# Altium PCB HP-server-silencer-PCB.pcbdoc
Units mm, origin at the board's own origin, x right, y up, seen from the top; angles counter-clockwise.
Board outline 83.4 x 60.4 mm, 2 copper layers (Top Layer, Bottom Layer); 26 components, 20 nets, 115 pads, 43 vias.
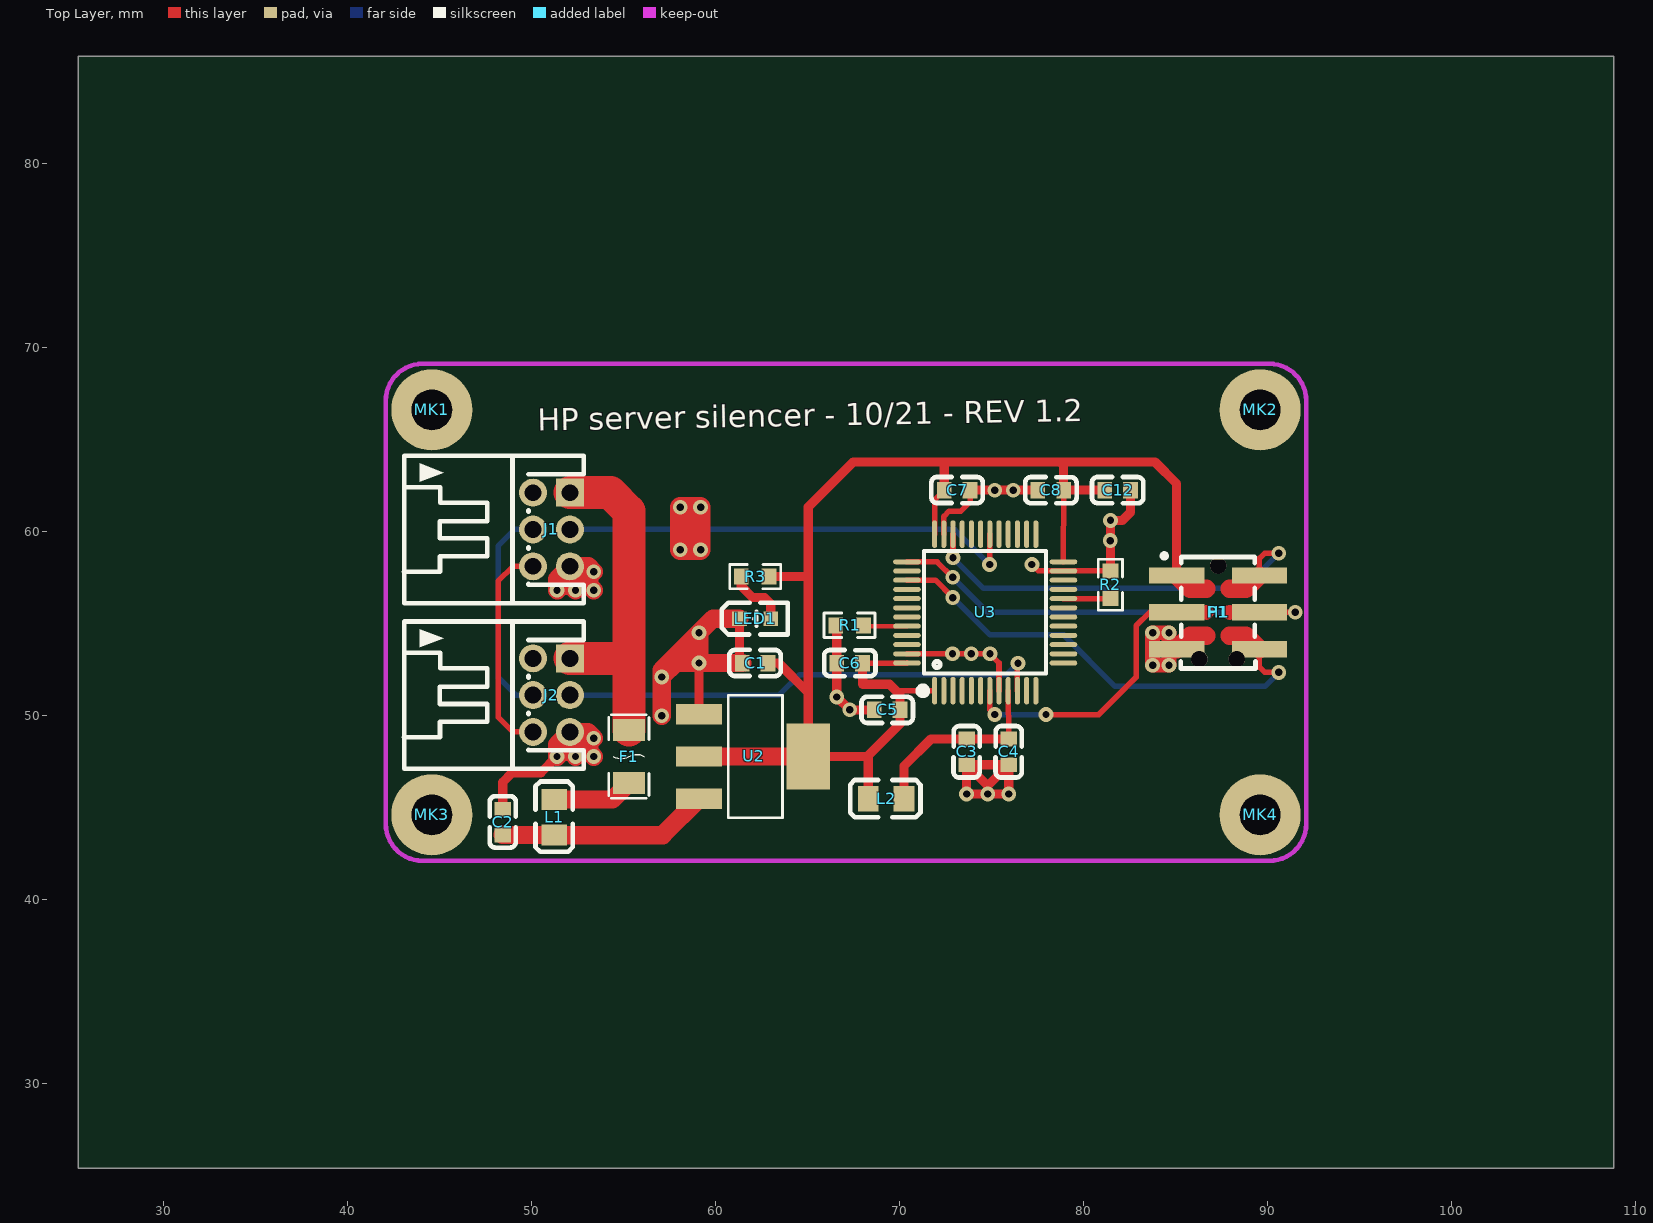
[diagram p0: Top Layer view]
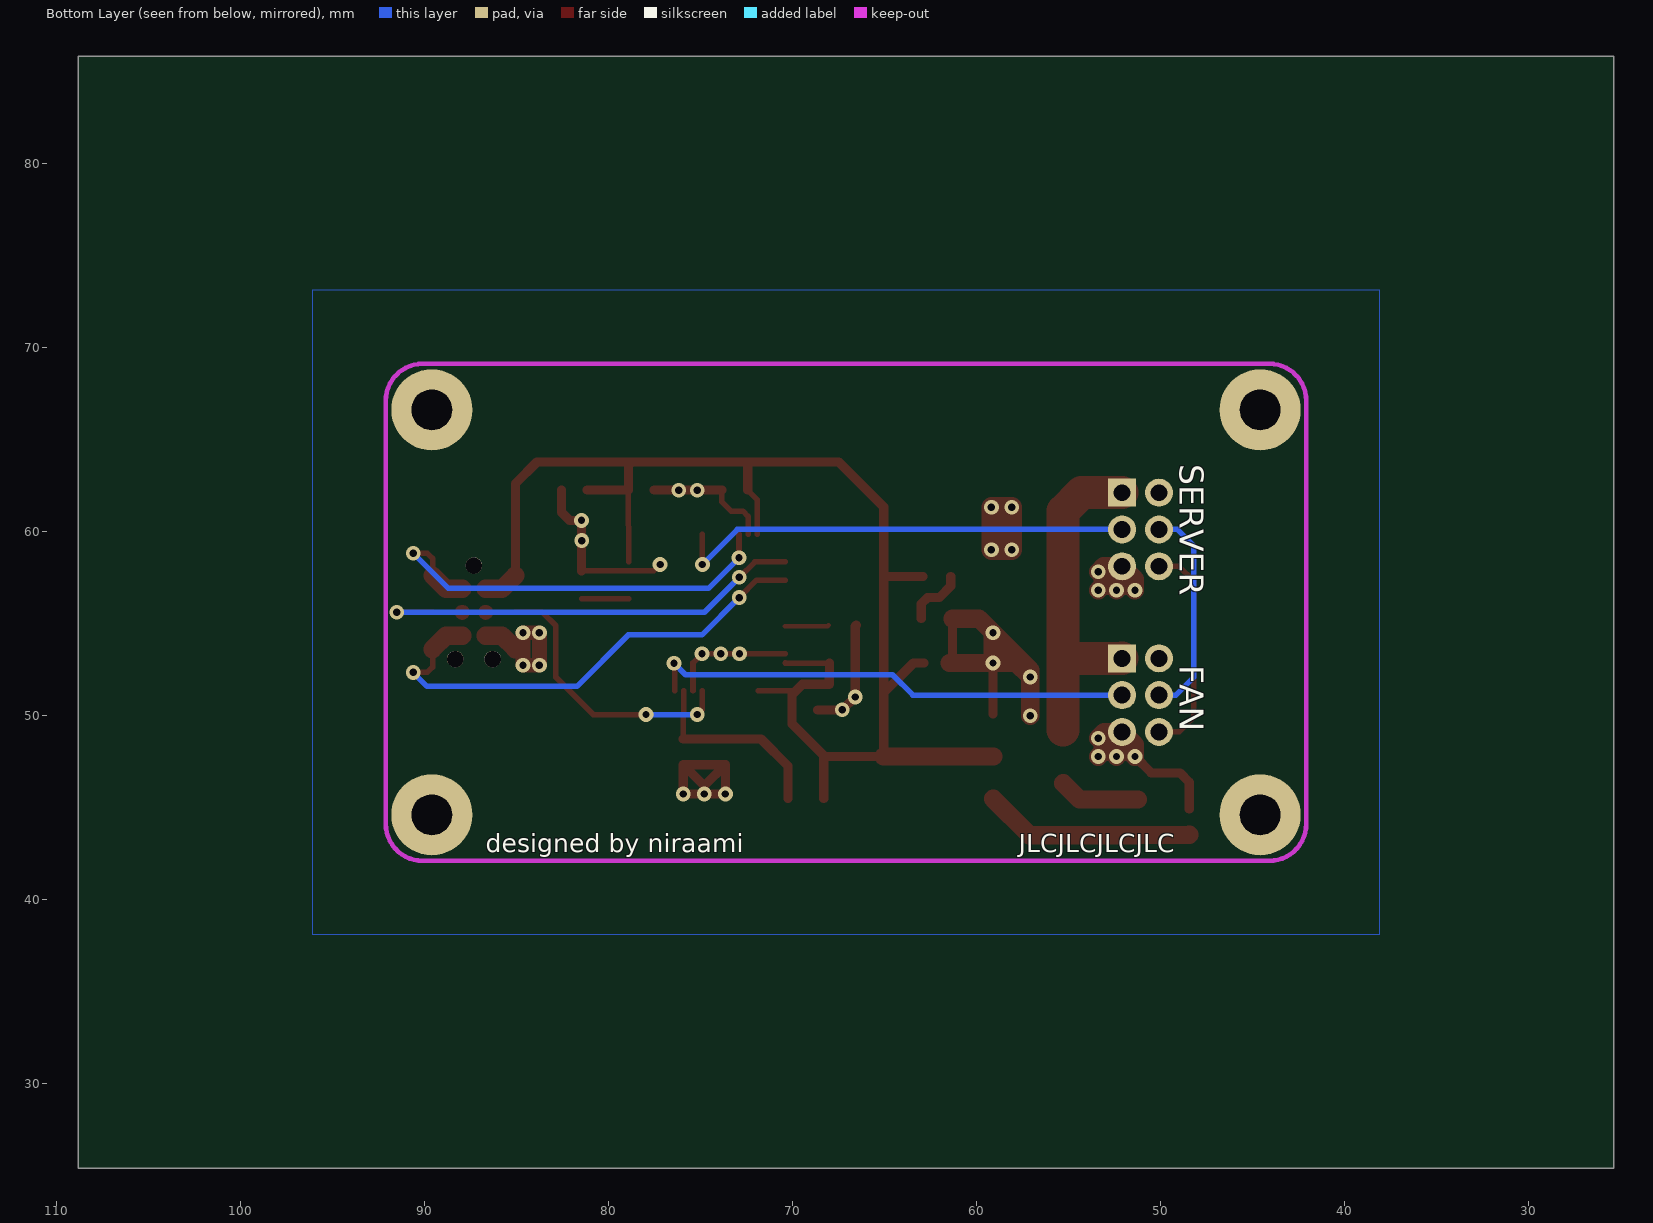
[diagram p1: Bottom Layer view, seen from below]

## Layer stack, top to bottom
Top Layer: signal copper (thickness not stored)
Dielectric: dielectric 0.32, FR-4, Dk 4.8
Bottom Layer: signal copper (thickness not stored)

## Board outline
108.8,25.4 25.4,25.4 25.4,85.8 108.8,85.8

## Components (designator, comment, footprint, x,y, rotation, side; value= is the part's Value field where it differs from the comment)
C1 "10uF" C0603 62.166,52.844 r0 top
C2 "10uF" C0603 48.45,44.208 r270 top
C3 "100nF" C0603 73.65,48.014 r270 top
C4 "10nF" C0603 75.936,48.014 r270 top
C5 "100nF" C0603 69.332,50.3 r180 top
C6 "100nF" C0603 67.3,52.84 r180 top
C7 "100nF" C0603 73.142,62.238 r0 top
C8 "100nF" C0603 78.222,62.238 r180 top
C12 "10uF" C0603 81.851,62.242 r180 top
F1 "350mA" F1206 55.308,47.764 r270 top
H1 "SMD header" HDR-SMD_6P-P2.00-V-M-R2-C3-S2.0 87.312,55.6 r270 top
J1 "PHD-2*3AW" CONN-TH_A2004WR-2X03P 51.099,60.099 r270 top
J2 "PHD-2*3AW" CONN-TH_A2004WR-2X03P 51.099,51.1 r270 top
L1 "100 @ 100MHz" L0805 51.244,44.462 r270 top
L2 "100 @ 100MHz" L0805 69.278,45.478 r0 top
LED1 "Green" LED0603-R-RD 62.166,55.257 r0 top
MK1 "Mounting_Hole_PAD" MOUNTINGHOLE_2.2MM_M2_PAD 44.6,66.6 r0 top
MK2 "Mounting_Hole_PAD" MOUNTINGHOLE_2.2MM_M2_PAD 89.6,66.6 r0 top
MK3 "Mounting_Hole_PAD" MOUNTINGHOLE_2.2MM_M2_PAD 44.6,44.6 r0 top
MK4 "Mounting_Hole_PAD" MOUNTINGHOLE_2.2MM_M2_PAD 89.6,44.6 r0 top
P1 "TC2030-NL" TC2030-MCP-NL-JKA 87.312,58.14 r270 top
R1 "10K" R0603 67.298,54.894 r0 top
R2 "10K" R0603 81.462,57.096 r270 top
R3 "180" R0603 62.166,57.543 r0 top
U2 "AMS1117-3.3" SOT-223-3_L6.5-W3.4-P2.30-LS7.0-BR 62.078,47.768 r180 top
U3 "STM32F103C8" LQFP-48_L7.0-W7.0-P0.50-LS9.0-BL 74.663,55.595 r0 top

## Footprints (in the part's own frame and the unit in brackets; to place one, negate y for a bottom-side part, rotate by r counter-clockwise, add the part's x,y. Pads: shape width x height; smd on the part's side, far side on the other; paste and mask are expansions set on the pad)
C0603 [mm]
  rect 0.8x0.9 smd: 1(-0.7,0) 2(0.7,0)
  silkscreen extent -1.41,-0.71 1.39,0.72
CONN-TH_A2004WR-2X03P [mil]
  rect 60x60 hole 36: 1(-78.74,39.37)
  round 60 hole 36: 2(-78.74,-39.37) 3(0,39.37) 4(0,-39.37) 5(78.74,39.37) 6(78.74,-39.37)
  silkscreen extent -157,-315 157,69
F1206 [mm]
  rect 1.19x1.728 smd: 1(-1.445,0) 2(1.445,0)
  silkscreen extent -2.27,-1.09 2.27,1.09
HDR-SMD_6P-P2.00-V-M-R2-C3-S2.0 [mm]
  rect 0.89x3 smd: 1(-2,-2.25) 2(-2,2.25) 3(0,-2.25) 4(0,2.25) 5(2,-2.25) 6(2,2.25)
  silkscreen extent -3.19,-3.05 3.05,2.03
L0805 [mm]
  rect 1.133x1.377 smd: 1(-0.966,0) 2(0.966,0)
  silkscreen extent -1.95,-1.02 1.86,1.02
LED0603-R-RD [mm]
  rect 0.8x0.8 smd: 1(0.851,0) 2(-0.851,0)
  silkscreen extent -1.82,-0.86 1.77,0.86
LQFP-48_L7.0-W7.0-P0.50-LS9.0-BL [mm]
  oval 0.27x1.5 smd: 1(-2.75,-4.25) 2(-2.25,-4.25) 3(-1.75,-4.25) 4(-1.25,-4.25) 5(-0.75,-4.25) 6(-0.25,-4.25) 7(0.25,-4.25) 8(0.75,-4.25) 9(1.25,-4.25) 10(1.75,-4.25) 11(2.25,-4.25) 12(2.75,-4.25) 25(2.75,4.25) 26(2.25,4.25) 27(1.75,4.25) 28(1.25,4.25) 29(0.75,4.25) 30(0.25,4.25) 31(-0.25,4.25) 32(-0.75,4.25) 33(-1.25,4.25) 34(-1.75,4.25) 35(-2.25,4.25) 36(-2.75,4.25)
  oval 1.5x0.27 smd: 13(4.25,-2.75) 14(4.25,-2.25) 15(4.25,-1.75) 16(4.25,-1.25) 17(4.25,-0.75) 18(4.25,-0.25) 19(4.25,0.25) 20(4.25,0.75) 21(4.25,1.25) 22(4.25,1.75) 23(4.25,2.25) 24(4.25,2.75) 37(-4.25,2.75) 38(-4.25,2.25) 39(-4.25,1.75) 40(-4.25,1.25) 41(-4.25,0.75) 42(-4.25,0.25) 43(-4.25,-0.25) 44(-4.25,-0.75) 45(-4.25,-1.25) 46(-4.25,-1.75) 47(-4.25,-2.25) 48(-4.25,-2.75)
  silkscreen extent -3.59,-4.46 3.3,3.34
MOUNTINGHOLE_2.2MM_M2_PAD [mm]
  round 4.4 hole 2.2 slot 2.205 at 0 deg: 1(0,0)
R0603 [mm]
  rect 0.806x0.864 smd: 1(-0.753,0) 2(0.753,0)
  silkscreen extent -1.39,-0.66 1.39,0.66
SOT-223-3_L6.5-W3.4-P2.30-LS7.0-BR [mm]
  rect 2.5x1.1 smd: 1(2.97,-2.3) 2(2.97,0) 3(2.97,2.3)
  rect 2.34x3.6 smd: 4(-2.97,0)
  silkscreen extent -1.57,-3.33 1.37,3.33
TC2030-MCP-NL-JKA [mil]
  round 0 smd: 1(50,-25) 2(50,25) 3(100,-25) 4(100,25) 5(150,-25) 6(150,25)
  round 35.44 hole 35.44 unplated: ""(0,0) ""(200,-40) ""(200,40)
  Top Layer region: 34.5,25 34.61,26.87 34.95,28.71 35.51,30.5 36.28,32.2 37.24,33.8 38.4,35.28 39.72,36.6 41.19,37.76 42.8,38.72 44.5,39.49 46.29,40.05 48.13,40.39 50,40.5 50,40.5 51.87,40.39 53.71,40.05 55.5,39.49 57.2,38.72 58.8,37.76 60.28,36.6 61.6,35.28 62.76,33.8 63.72,32.2 64.49,30.5 65.05,28.71 65.39,26.87 65.5,25 65.5,25 65.39,23.13 65.05,21.29 64.49,19.5 63.72,17.8 62.76,16.19 61.6,14.72 60.28,13.4 58.8,12.24 57.2,11.28 55.5,10.51 53.71,9.95 51.87,9.61 50,9.5 50,9.5 48.13,9.61 46.29,9.95 44.5,10.51 42.8,11.28 41.19,12.24 39.72,13.4 38.4,14.72 37.24,16.19 36.28,17.8 35.51,19.5 34.95,21.29 34.61,23.13
  Top Layer region: 84.5,25 84.61,26.87 84.95,28.71 85.51,30.5 86.28,32.2 87.24,33.8 88.4,35.28 89.72,36.6 91.19,37.76 92.8,38.72 94.5,39.49 96.29,40.05 98.13,40.39 100,40.5 100,40.5 101.87,40.39 103.71,40.05 105.5,39.49 107.2,38.72 108.8,37.76 110.28,36.6 111.6,35.28 112.76,33.8 113.72,32.2 114.49,30.5 115.05,28.71 115.39,26.87 115.5,25 115.5,25 115.39,23.13 115.05,21.29 114.49,19.5 113.72,17.8 112.76,16.19 111.6,14.72 110.28,13.4 108.8,12.24 107.2,11.28 105.5,10.51 103.71,9.95 101.87,9.61 100,9.5 100,9.5 98.13,9.61 96.29,9.95 94.5,10.51 92.8,11.28 91.19,12.24 89.72,13.4 88.4,14.72 87.24,16.19 86.28,17.8 85.51,19.5 84.95,21.29 84.61,23.13
  Top Layer region: 134.5,25 134.61,26.87 134.95,28.71 135.51,30.5 136.28,32.2 137.24,33.8 138.4,35.28 139.72,36.6 141.19,37.76 142.8,38.72 144.5,39.49 146.29,40.05 148.13,40.39 150,40.5 150,40.5 151.87,40.39 153.71,40.05 155.5,39.49 157.2,38.72 158.8,37.76 160.28,36.6 161.6,35.28 162.76,33.8 163.72,32.2 164.49,30.5 165.05,28.71 165.39,26.87 165.5,25 165.5,25 165.39,23.13 165.05,21.29 164.49,19.5 163.72,17.8 162.76,16.19 161.6,14.72 160.28,13.4 158.8,12.24 157.2,11.28 155.5,10.51 153.71,9.95 151.87,9.61 150,9.5 150,9.5 148.13,9.61 146.29,9.95 144.5,10.51 142.8,11.28 141.19,12.24 139.72,13.4 138.4,14.72 137.24,16.19 136.28,17.8 135.51,19.5 134.95,21.29 134.61,23.13
  Top Layer region: 134.5,-25 134.61,-23.13 134.95,-21.29 135.51,-19.5 136.28,-17.8 137.24,-16.19 138.4,-14.72 139.72,-13.4 141.19,-12.24 142.8,-11.28 144.5,-10.51 146.29,-9.95 148.13,-9.61 150,-9.5 150,-9.5 151.87,-9.61 153.71,-9.95 155.5,-10.51 157.2,-11.28 158.8,-12.24 160.28,-13.4 161.6,-14.72 162.76,-16.19 163.72,-17.8 164.49,-19.5 165.05,-21.29 165.39,-23.13 165.5,-25 165.5,-25 165.39,-26.87 165.05,-28.71 164.49,-30.5 163.72,-32.2 162.76,-33.8 161.6,-35.28 160.28,-36.6 158.8,-37.76 157.2,-38.72 155.5,-39.49 153.71,-40.05 151.87,-40.39 150,-40.5 150,-40.5 148.13,-40.39 146.29,-40.05 144.5,-39.49 142.8,-38.72 141.19,-37.76 139.72,-36.6 138.4,-35.28 137.24,-33.8 136.28,-32.2 135.51,-30.5 134.95,-28.71 134.61,-26.87
  Top Layer region: 84.5,-25 84.61,-23.13 84.95,-21.29 85.51,-19.5 86.28,-17.8 87.24,-16.19 88.4,-14.72 89.72,-13.4 91.19,-12.24 92.8,-11.28 94.5,-10.51 96.29,-9.95 98.13,-9.61 100,-9.5 100,-9.5 101.87,-9.61 103.71,-9.95 105.5,-10.51 107.2,-11.28 108.8,-12.24 110.28,-13.4 111.6,-14.72 112.76,-16.19 113.72,-17.8 114.49,-19.5 115.05,-21.29 115.39,-23.13 115.5,-25 115.5,-25 115.39,-26.87 115.05,-28.71 114.49,-30.5 113.72,-32.2 112.76,-33.8 111.6,-35.28 110.28,-36.6 108.8,-37.76 107.2,-38.72 105.5,-39.49 103.71,-40.05 101.87,-40.39 100,-40.5 100,-40.5 98.13,-40.39 96.29,-40.05 94.5,-39.49 92.8,-38.72 91.19,-37.76 89.72,-36.6 88.4,-35.28 87.24,-33.8 86.28,-32.2 85.51,-30.5 84.95,-28.71 84.61,-26.87
  Top Layer region: 34.5,-25 34.61,-23.13 34.95,-21.29 35.51,-19.5 36.28,-17.8 37.24,-16.19 38.4,-14.72 39.72,-13.4 41.19,-12.24 42.8,-11.28 44.5,-10.51 46.29,-9.95 48.13,-9.61 50,-9.5 50,-9.5 51.87,-9.61 53.71,-9.95 55.5,-10.51 57.2,-11.28 58.8,-12.24 60.28,-13.4 61.6,-14.72 62.76,-16.19 63.72,-17.8 64.49,-19.5 65.05,-21.29 65.39,-23.13 65.5,-25 65.5,-25 65.39,-26.87 65.05,-28.71 64.49,-30.5 63.72,-32.2 62.76,-33.8 61.6,-35.28 60.28,-36.6 58.8,-37.76 57.2,-38.72 55.5,-39.49 53.71,-40.05 51.87,-40.39 50,-40.5 50,-40.5 48.13,-40.39 46.29,-40.05 44.5,-39.49 42.8,-38.72 41.19,-37.76 39.72,-36.6 38.4,-35.28 37.24,-33.8 36.28,-32.2 35.51,-30.5 34.95,-28.71 34.61,-26.87

## Via types
v1: diameter 0.8, hole 0.4, Top Layer to Bottom Layer, 43 vias

## Nets (pads, with @x,y where several pads share a name; then routed paths per layer and width w, separated by ;. In a path a pad name is that pad's centre, name@x,y a point inside that pad or via, vN(x,y) a via of type N, cw(c..) or ccw(c..) an arc to the next point about the centre after c; other vN are vias at no path point)
+3V3: C1.2 C5.1 C6.1 C7.1 C8.1 C12.2 H1.1 L2.1 P1.1 R3.2 U2.2 U2.4 U3.1 U3.24 U3.36 U3.48 | length 82.2
  Top Layer w0.3: C6.1 U3.48@70.412,52.846 ; 69.812,51.346 U3.1@71.873,51.346 ; U3.36 71.912,61.708 C7.1@72.442,62.238 ; U3.24@78.912,58.346 C8.1
  Top Layer w0.5: C1.2 63.436,52.844 65.048,51.232 ; R3.2 65.048,57.543 ; C6.1 68.006,51.696 ; 68.006,51.697 69.462,51.696 70.032,51.126 C5.1 70.032,49.538 68.262,47.768 ; L2.1 68.312,47.718 68.262,47.768 ; C7.1@72.442,62.238 72.442,63.761 72.443,63.762 ; C8.1 78.922,63.57 78.73,63.762 ; C8.1 78.928,62.242 C12.2 ; H1.1 85.062,62.587 83.887,63.762 78.73,63.762 ; 65.048,51.232 65.048,61.318 67.492,63.762 78.73,63.762 ; 65.048,51.232 U2.4 68.262,47.768
  Top Layer w1: U2.2 U2.4 ; H1.1 85.792,56.87 P1.1
+3V3A: C3.1 C4.1 L2.2 U3.9 | length 10.7
  Top Layer w0.3: U3.9 C4.1
  Top Layer w0.5: L2.2 70.244,47.244 71.714,48.714 C3.1 C4.1
BOOT0: R1.2 U3.44 | length 2.4
  Top Layer w0.254: R1.2 68.099,54.846 U3.44@70.412,54.846
BOOT1: R2.2 U3.20 | length 2.6
  Top Layer w0.3: U3.20 R2.2
F1_2: F1.2 L1.1 | length 4.4
  Top Layer w1: L1.1 54.417,45.428 F1.2
FAN_SENSE: J1.6 J2.6 | length 11.9
  Top Layer w0.3: J2.6 49,49.1 48.196,49.904 48.196,57.289 49.007,58.1 J1.6
GND: C1.1 C2.1 C3.2 C4.2 C5.2 C6.2 C7.2 C8.2 C12.1 H1.5 J1.5 J2.5 LED1.2 MK1.1 MK2.1 MK3.1 MK4.1 P1.5 R1.1 R2.1 U2.1 U3.8 U3.23 U3.35 U3.47 | length 98.7
  Top Layer w0.3: U3.47@70.412,53.346 v1(72.888,53.348) v1(73.904,53.348) v1(74.92,53.348) 75.412,52.856 U3.8 ; U3.35 72.412,60.804 72.707,61.099 73.342,61.099 73.842,61.599 C7.2 ; v1(77.2,58.2) 77.554,57.846 U3.23@78.912,57.846 ; U3.23@78.913,57.846 R2.1
  Top Layer w0.5: C2.1 48.45,46.367 48.958,46.875 50.514,46.875 v1(51.403,47.764) v1(52.403,47.764) v1(53.403,47.764) v1(53.403,48.764) ; v1(51.403,56.797) v1(52.403,56.797) v1(53.403,56.797) v1(53.403,57.797) ; U2.1 v1(59.118,52.844) ; LED1.2 61.315,52.995 C1.1 ; R1.1 66.6,54.839 66.6,52.84 v1(66.6,51) v1(67.3,50.3) C5.2@68.632,50.3 ; C7.2 v1(75.174,62.238) v1(76.19,62.238) C8.2@77.522,62.238 ; R2.1 v1(81.462,59.496) ; v1(81.462,59.496) v1(81.47,60.591) 82.105,60.591 82.551,61.037 C12.1 ; C3.2 v1(73.65,45.728) v1(74.793,45.728) ; C3.2 C4.2 ; C3.2 74.793,46.171 ; v1(74.793,45.728) v1(75.936,45.728) C4.2 ; v1(74.793,45.728) 74.793,46.171 ; v1(74.793,45.728) 74.793,46.171 ; 74.793,46.171 C4.2
  Top Layer w0.8: v1(83.756,52.717) v1(84.645,52.717) v1(84.645,54.495) v1(83.756,54.495) v1(83.756,52.717)
  Top Layer w1: v1(51.403,47.764) 51.403,48.403 J2.5 ; v1(51.403,56.797) 51.403,57.403 J1.5 ; v1(52.403,47.764) 52.1,48.067 J2.5 ; v1(52.403,56.797) 52.1,57.1 J1.5 ; v1(53.403,47.764) 52.1,49.067 J2.5 ; v1(53.403,48.764) 53.067,49.1 J2.5 ; v1(53.403,56.797) J1.5 ; v1(53.403,57.797) 53.1,58.1 J1.5 ; v1(57.086,49.982) v1(57.086,52.082) ; LED1.2 59.88,55.257 v1(59.118,54.495) ; C1.1 v1(59.118,52.844) ; H1.5 85.792,54.33 P1.5 ; v1(57.086,52.082) 57.848,52.844 v1(59.118,52.844) ; v1(57.086,52.082) 57.086,52.463 v1(59.118,54.495) ; v1(59.118,52.844) v1(59.118,54.495)
  Top Layer w1.102: v1(58.1,59) v1(59.2,59) v1(59.2,61.3) v1(58.1,61.3) v1(58.1,59)
GND_LOOP: J1.4 J2.4 | length 11.7
  Bottom Layer w0.3: J2.4@50.101,51.099 49.179,51.099 48.196,52.082 48.196,59.194 49.103,60.101 J1.4@50.101,60.101
LED1_1: LED1.1 R3.1 | length 3.3
  Top Layer w0.5: R3.1 61.412,57.027 62.039,56.4 62.674,56.4 63.017,56.057 LED1.1
NRST: H1.3 P1.3 U3.7 | length 15.2
  Top Layer w0.3: U3.7 74.912,50.308 v1(75.174,50.046) ; v1(77.968,50.046) 80.831,50.046 82.867,52.082 82.867,54.876 83.591,55.6 H1.3
  Bottom Layer w0.3: v1(75.174,50.046) v1(77.968,50.046)
PWM_IN: J1.3 U3.30 | length 25.2
  Top Layer w0.3: v1(74.9,58.2) 74.9,59.834 U3.30
  Bottom Layer w0.3: J1.3 73,60.1 v1(74.9,58.2)
PWM_OUT: J2.3 U3.10 | length 26.6
  Top Layer w0.3: U3.10@76.412,51.346 76.412,52.808 v1(76.444,52.84)
  Bottom Layer w0.3: J2.3 63.469,51.099 64.579,52.209 75.813,52.209 v1(76.444,52.84)
S$1221: 
S$1241: 
S$1243: 
SWCLK: H1.4 P1.4 U3.37 | length 24.2
  Top Layer w0.3: U3.37 72.055,58.345 v1(72.9,57.5) ; H1.4 v1(91.5,55.6)
  Bottom Layer w0.3: v1(72.9,57.5) 74.8,55.6 v1(91.5,55.6)
SWDIO: H1.2 P1.2 U3.34 | length 24.5
  Top Layer w0.3: v1(72.913,58.559) U3.34 ; H1.2 89.562,58.523 89.852,58.813 v1(90.614,58.813)
  Top Layer w1: P1.2 88.832,56.87 H1.2
  Bottom Layer w0.3: v1(72.913,58.559) 74.572,56.9 76.7,56.9 88.701,56.9 v1(90.614,58.813)
SWO: H1.6 P1.6 U3.39 | length 27
  Top Layer w0.3: U3.39 71.955,57.345 v1(72.9,56.4) ; H1.6 89.562,52.626 89.852,52.336 v1(90.614,52.336)
  Top Layer w1: P1.6 88.832,54.33 H1.6
  Bottom Layer w0.3: v1(72.9,56.4) 74.932,54.368 78.93,54.368 81.724,51.574 89.852,51.574 v1(90.614,52.336)
U2_3: C2.2 L1.2 U2.3 | length 11.5
  Top Layer w1: C2.2 51.244,43.497 57.136,43.496 U2.3
VCC12V: F1.1 J1.1 J2.1 | length 18.7
  Top Layer w1.8: J2.1@52.1,53.101 55.308,53.095 ; J1.1@52.1,62.1 54.307,62.1 55.308,61.099 F1.1
pads on no net: J1.2 J2.2 P1. U3.2 U3.3 U3.4 U3.5 U3.6 U3.11 U3.12 U3.13 U3.14 U3.15 U3.16 U3.17 U3.18 U3.19 U3.21 U3.22 U3.25 U3.26 U3.27 U3.28 U3.29 U3.31 U3.32 U3.33 U3.38 U3.40 U3.41 U3.42 U3.43 U3.45 U3.46

## Polygon pours and split planes (outlines as drawn)
GND on Bottom Layer (solid): 38.1,73.1 96.1,73.1 96.1,38.1 38.1,38.1 38.1,39.1

## Keep-outs
Keep-Out Layer:
  lines w0.254 net S$1221: 42.1,44.1 ccw(c44.1,44.1) 44.1,42.1 ; 42.1,67.1 cw(c44.1,67.1) 44.1,69.1 ; 90.1,42.1 ccw(c90.1,44.1) 92.1,44.1 ; 90.1,69.1 cw(c90.1,67.1) 92.1,67.1

## Silkscreen, mask and mechanical layers (free items; w line width, h text height)
Top Overlay:
  text "HP server silencer - 10/21 - REV 1.2" at 50.365,65.452 h1.2 r1
Bottom Overlay:
  text "SERVER" at 48.973,63.639 h1.3 r90
  text "FAN" at 48.973,52.717 h1.3 r90
  text "JLCJLCJLCJLC" at 57.721,42.565 h1
  text "designed by niraami" at 86.677,42.565 h1
Document:
  text "GND plane bridge" at 58.921,58.94 h0.2 r90
  text "GND plane bridge" at 57.8,51.5 h0.2 r90